# Altium PCB AT89S52单片机入门与提高.PcbDoc (part 1 of 4)
Units mm, origin at the board's own origin, x right, y up, seen from the top; angles counter-clockwise.
Board outline 152.4 x 101.6 mm, 2 copper layers (Top Layer, Bottom Layer); 111 components, 112 nets, 451 pads, 53 vias.
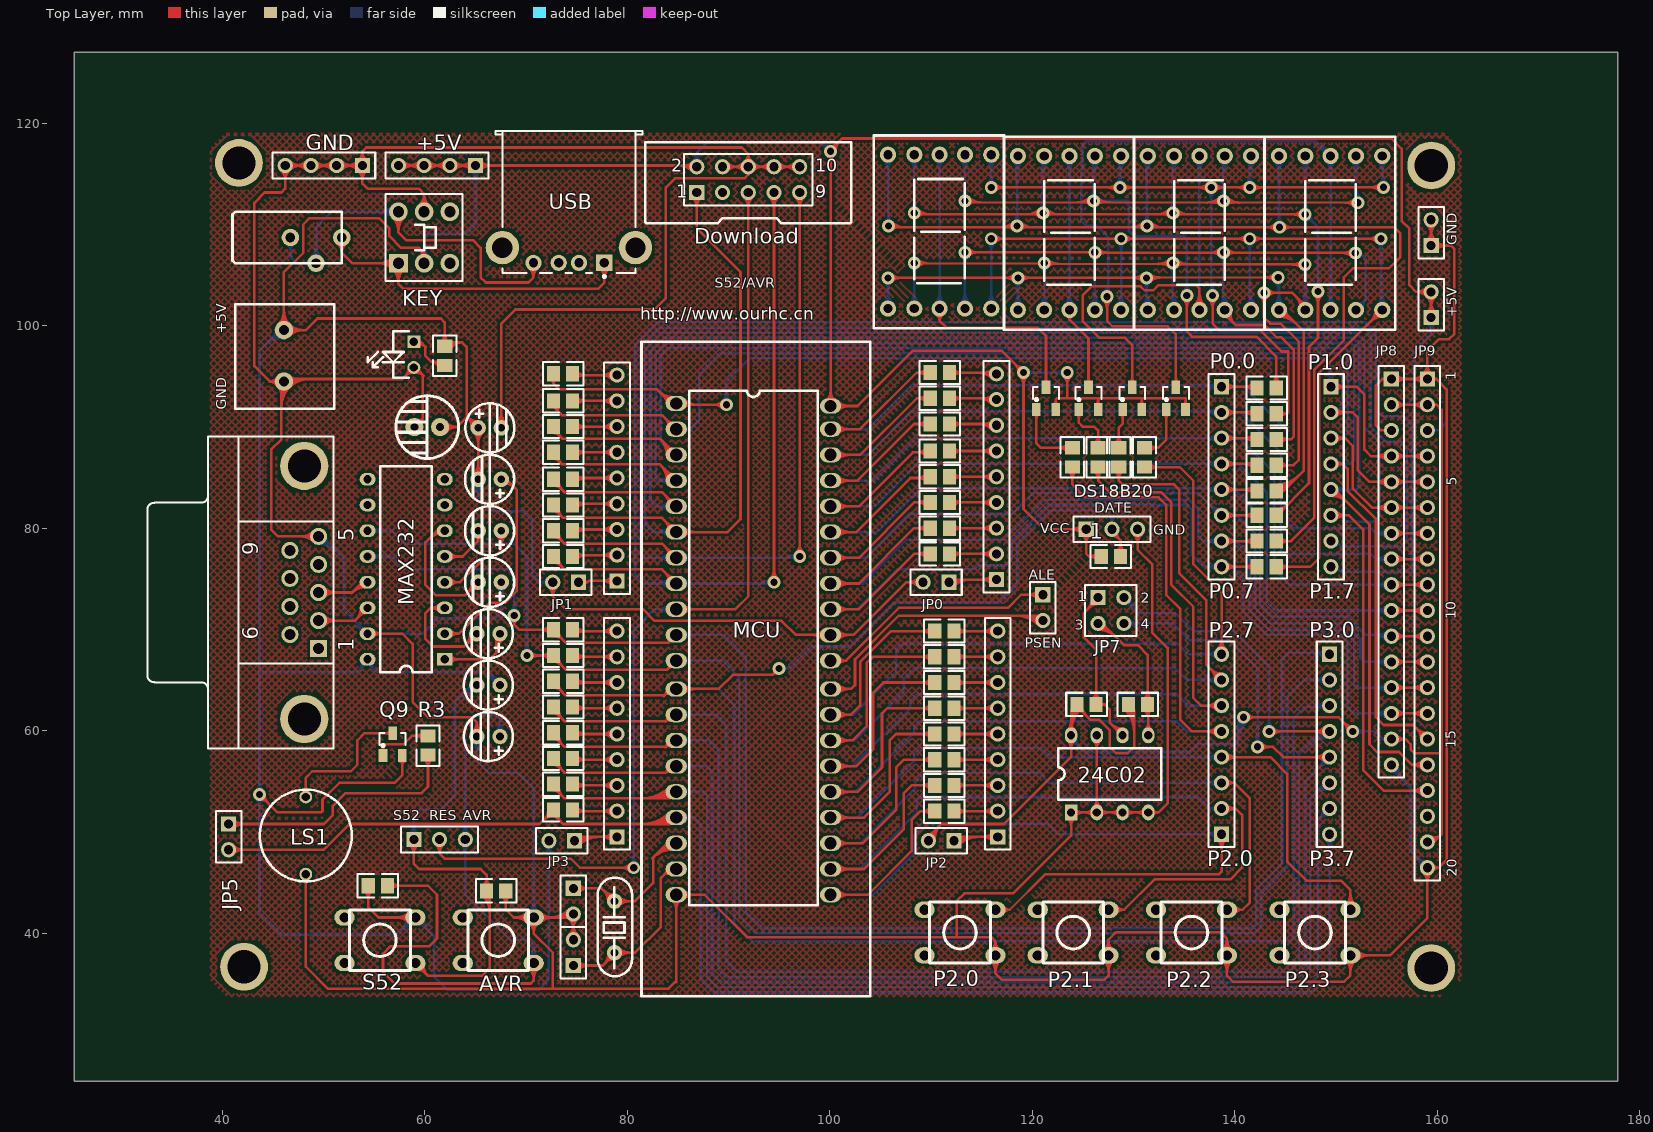
[diagram p0: Top Layer view]
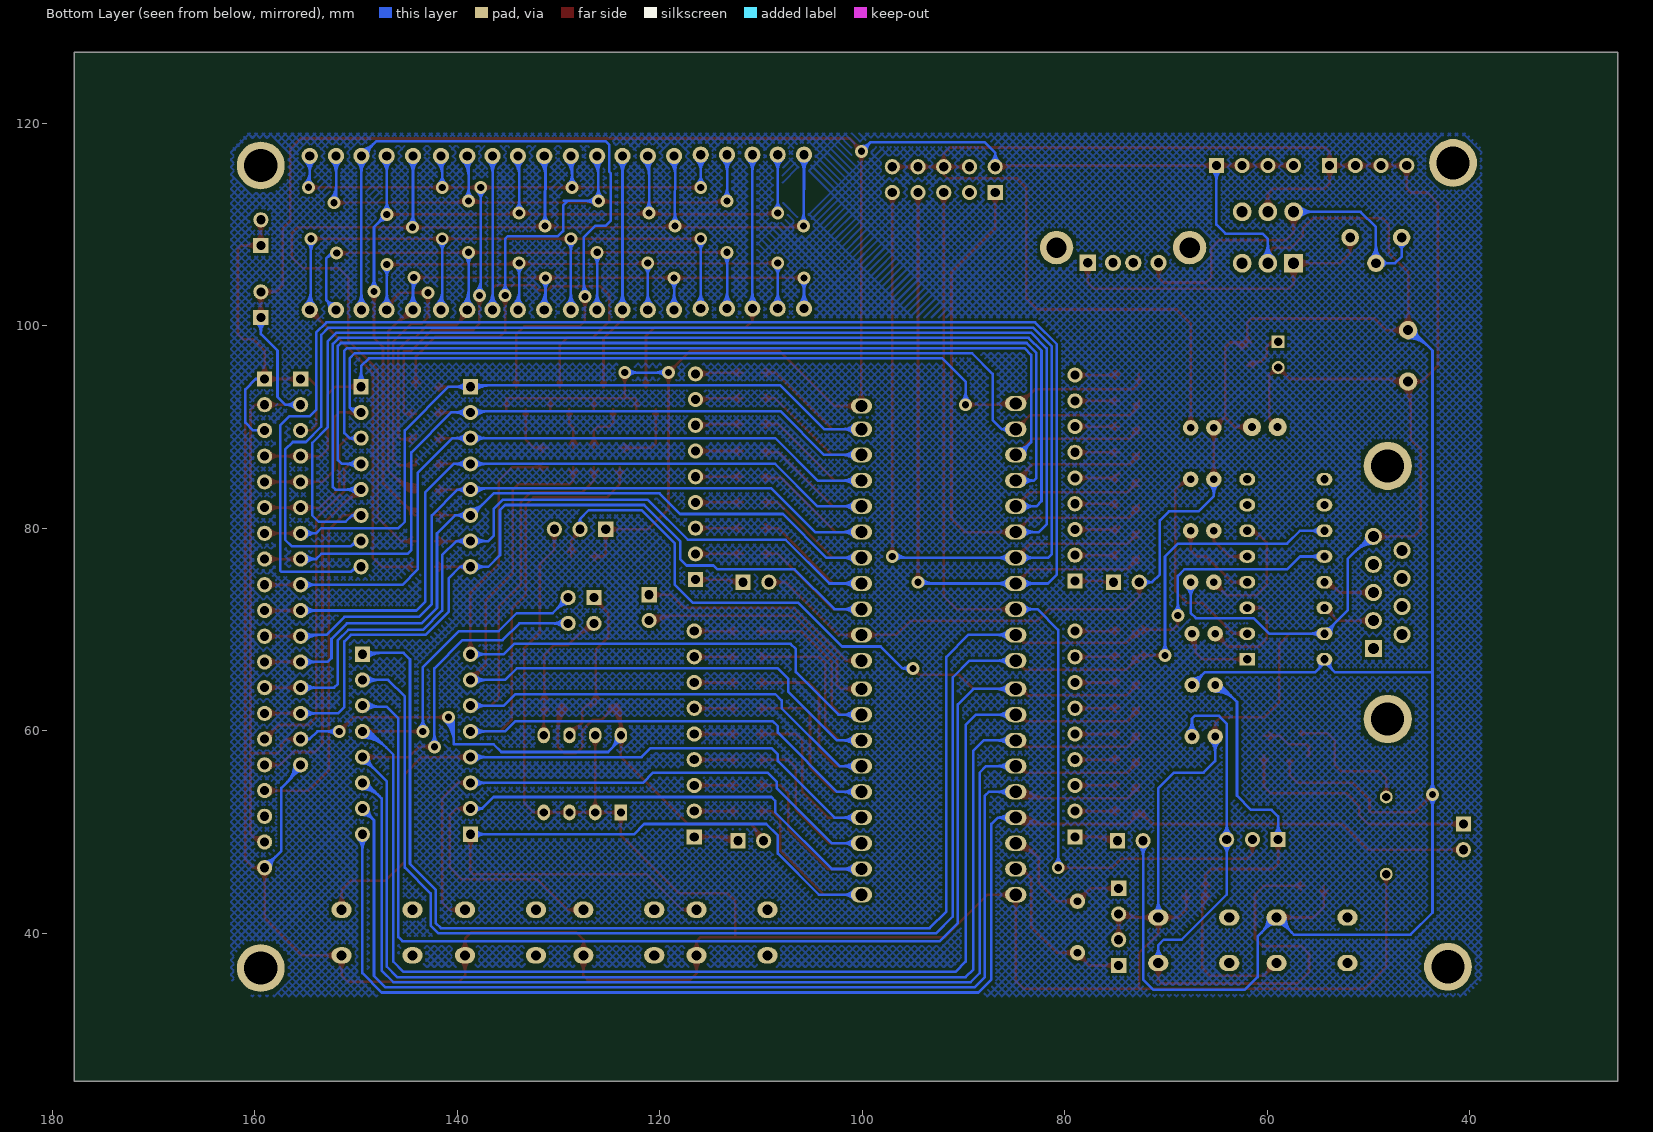
[diagram p1: Bottom Layer view, seen from below]

## Layer stack, top to bottom
Top Layer: signal copper 0.0356
Dielectric: dielectric 0.32, FR-4, Dk 4.8
Bottom Layer: signal copper 0.0356

## Board outline
25.4,25.4 177.8,25.4 177.8,127 25.4,127

## Design rules (kind name [scope] priority, off if disabled: settings)
Clearance [All] p1: gap=0.254
ComponentClearance [All] p1: gap=0.254 collisioncheckmode=3 verticalgap=0.254
PolygonConnect [All] p1: connectstyle=Relief reliefconductorwidth=0.254 reliefentries=4 polygonreliefangle="90 Angle"
RoutingVias [All] p1: holewidth=0.711 width=1.27 viastyle="Through Hole" minholewidth=0.711 minwidth=1.27 maxholewidth=0.711 maxwidth=1.27
SolderMaskExpansion [All] p1: expansion=0.102
TestPointUsage [All] p1: valid=0 allowmultiple=FALSE
Testpoint [All] p1: side=15 testpointundercomponent=TRUE minsize=1.016 maxsize=2.54 preferedsize=1.524 minholesize=0 maxholesize=1.016 preferedholesize=0.813 testpointgrid=0.025 style=1023 order=0-112345678
Width [All] p1: maxlimit=0.254 minlimit=0.254 preferedwidth=0.254
17 further rules are at their usual default settings.

## Classes and differential pairs
component class AT89S52单片机入门与提高: +5V AVR Designator5

## Components (designator, comment, footprint, x,y, rotation, side; value= is the part's Value field where it differs from the comment)
1 "470" R2012-0805 127.762,77.216 r180 top (schematic designator R20)
24C02 "24LC02" DIP8 123.825,51.943 r90 top (schematic designator U2)
+5V "" HDR1X4 65.024,115.824 r180 top
+5V "" JK128 47.244,99.06 r0 top (schematic designator POWER)
+5V "Comment" HDR-2 160.528,104.648 r90 top
ALE "Comment" HDR-2 119.888,69.596 r270 top
AVR "" an-6*6 61.087,44.45 r180 top
C1 "100uF\25v" C-DJ-6 58.928,89.916 r180 top
C2 "10uf" C-DJ-4 65.024,67.056 r180 top
C3 "10uf" C-DJ-4 65.024,61.976 r180 top
C5 "10uf" C-DJ-4 67.691,87.376 r0 top
C6 "10uf" C-DJ-4 65.151,87.376 r180 top
C7 "10uf" C-DJ-4 65.151,82.296 r180 top
C8 "10uf" C-DJ-4 65.151,77.216 r180 top
C9 "10uf" C-DJ-4 65.024,72.136 r180 top
CX1 "30p" HDR1X2 74.676,36.83 r90 top
CX2 "30p" HDR1X2 74.676,44.45 r270 top
D1-0 "LED" R2012-0805 110.871,95.377 r180 top
D1-1 "LED" R2012-0805 73.66,95.25 r180 top
D1-2 "LED" R2012-0805 111.318,52.07 r180 top
D1-3 "LED" R2012-0805 73.66,69.977 r180 top
D2-0 "LED" R2012-0805 110.871,92.837 r180 top
D2-1 "LED" R2012-0805 73.66,92.583 r180 top
D2-2 "LED" R2012-0805 111.318,54.61 r180 top
D2-3 "LED" R2012-0805 73.66,67.437 r180 top
D3-0 "LED" R2012-0805 110.871,90.297 r180 top
D3-1 "LED" R2012-0805 73.66,90.043 r180 top
D3-2 "LED" R2012-0805 111.318,57.15 r180 top
D3-3 "LED" R2012-0805 73.66,64.897 r180 top
D4-0 "LED" R2012-0805 110.871,87.63 r180 top
D4-1 "LED" R2012-0805 73.66,87.503 r180 top
D4-2 "LED" R2012-0805 111.318,59.69 r180 top
D4-3 "LED" R2012-0805 73.66,62.357 r180 top
D5-0 "LED" R2012-0805 110.871,85.09 r180 top
D5-1 "LED" R2012-0805 73.66,84.836 r180 top
D5-2 "LED" R2012-0805 111.318,62.23 r180 top
D5-3 "LED" R2012-0805 73.66,59.817 r180 top
D6-0 "LED" R2012-0805 110.871,82.55 r180 top
D6-1 "LED" R2012-0805 73.66,82.296 r180 top
D6-2 "LED" R2012-0805 111.318,64.77 r180 top
D6-3 "LED" R2012-0805 73.66,57.277 r180 top
D7-0 "LED" R2012-0805 110.871,80.01 r180 top
D7-1 "LED" R2012-0805 73.66,79.756 r180 top
D7-2 "LED" R2012-0805 111.318,67.31 r180 top
D7-3 "LED" R2012-0805 73.66,54.737 r180 top
D8-0 "LED" R2012-0805 110.871,77.47 r180 top
D8-1 "LED" R2012-0805 73.66,77.216 r180 top
D8-2 "LED" R2012-0805 111.318,69.85 r180 top
D8-3 "LED" R2012-0805 73.66,52.197 r180 top
Download "Download" HDR-2x5 91.948,113.284 r0 top
DS1 "LG5011BSR" LED-BSR 110.744,106.807 r0 top
DS2 "LG5011BSR" LED-BSR 123.571,106.68 r0 top
DS3 "LG5011BSR" LED-BSR 136.398,106.68 r0 top
DS4 "LG5011BSR" LED-BSR 149.352,106.68 r0 top
DS18B20 "Comment" HDR-3 131.572,78.74 r0 top
GND "" HDR1X4 53.848,115.824 r180 top
GND "Comment" HDR-2 160.528,111.76 r90 top
J61 "D Connector 9" DSUB1.385-2H9 38.608,73.66 r90 top
JP0 "" HDR1X2 111.76,74.676 r180 top
JP1 "" HDR1X2 75.184,74.676 r180 top
JP2 "" HDR1X2 112.268,49.149 r180 top
JP3 "" HDR1X2 74.803,49.149 r180 top
JP5 "" HDR1X2 40.64,50.8 r270 top (schematic designator JP6)
JP7 "" HDR2X2 126.492,73.152 r270 top
JP8 "Header 16" HDR1X16 155.448,94.742 r270 top
JP9 "" HDR1X20 159.004,94.742 r270 top
KEY "SW-DPST" DPDT-6 59.944,108.712 r90 top
LED1 "LED" LED 58.42,96.393 r90 top
LS1 "" LS1PF 48.26,53.467 r270 top
MAX232 "MAX232" DIP16 61.976,67.056 r180 top (schematic designator U4)
MCU "AT89S52" AT89S52Pid 116.84,65.532 r0 top (schematic designator U1)
P0.0 "" HDR1X8 138.684,93.98 r270 top (schematic designator P0)
P1.0 "" HDR1X8 149.479,93.98 r270 top (schematic designator P1)
P2.0 "key1" an-6*6 106.68,45.212 r180 top
P2.0 "" HDR1X8 138.684,49.784 r90 top (schematic designator P2)
P2.1 "key2" an-6*6 117.856,45.212 r180 top
P2.2 "key3" an-6*6 129.54,45.212 r180 top
P2.3 "key4" an-6*6 141.732,45.212 r180 top
P3.0 "" HDR1X8 149.352,67.564 r270 top (schematic designator P3)
P-R0 "" HDR1X9#1 116.459,95.25 r270 top
P-R1 "" HDR1X9#1 78.994,95.123 r270 top
P-R2 "" HDR1X9#2 116.586,49.53 r90 top
P-R3 "" HDR1X9#1 78.994,69.85 r270 top
Q1 "2N3906" SO-G3 122.301,92.71 r0 top
Q2 "2N3906" SO-G3 126.492,92.71 r0 top
Q3 "2N3906" SO-G3 130.81,92.71 r0 top
Q4 "2N3906" SO-G3 135.128,92.71 r0 top
Q9 "2N3906" SO-G3 57.785,58.547 r0 top
R1 "4.7k" R2012-0805 61.976,97.028 r270 top
R3 "10k" R2012-0805 60.325,58.547 r90 top
R4 "10k" R2012-0805 130.429,62.611 r180 top
R5 "10k" R2012-0805 125.349,62.611 r180 top
R11 "470" R2012-0805 143.129,93.853 r0 top
R12 "470" R2012-0805 143.129,91.313 r0 top
R13 "470" R2012-0805 143.129,88.773 r0 top
R14 "470" R2012-0805 143.129,86.233 r0 top
R15 "470" R2012-0805 143.129,83.693 r0 top
R16 "470" R2012-0805 143.129,81.28 r0 top
R17 "470" R2012-0805 143.129,78.74 r0 top
R18 "470" R2012-0805 143.129,76.2 r0 top
R20 "470" R2012-0805 123.952,86.995 r90 top
R21 "470" R2012-0805 126.492,86.995 r90 top
R22 "470" R2012-0805 128.524,86.995 r90 top
R23 "470" R2012-0805 131.064,86.995 r90 top
R51 "10k" R2012-0805 67.056,44.196 r0 top
Ravr "10k" R2012-0805 55.372,44.704 r180 top
RES "" HDR1X3 58.928,49.276 r0 top
S52 "" an-6*6 49.403,44.45 r180 top
USB "" USB-5V 70.612,108.712 r90 top
Y "Y" 11.0592M 78.74,43.18 r90 top
? "Comment" "prower xiao" 49.276,103.632 r0 top

## Footprints (in the part's own frame and the unit in brackets; to place one, negate y for a bottom-side part, rotate by r counter-clockwise, add the part's x,y. Pads: shape width x height; smd on the part's side, far side on the other; paste and mask are expansions set on the pad)
11.0592M [mil]
  round 60 hole 30: 1(-200,0) 2(0,0)
  silkscreen extent -292,-68 92,65
an-6*6 [mm]
  oval 2x1.6 hole 1: 1(-9.675,7.381) 2(-9.675,2.881) 3(-2.675,2.881) 4(-2.675,7.381)
  silkscreen extent -9.17,2.13 -3.18,8.13
AT89S52Pid [mil]
  oval 82.87x59.24 hole 47.75: 1(-1260.15,1054.96) 2(-1260.15,954.96) 3(-1260.15,854.96) 4(-1260.15,754.96) 5(-1260.15,654.96) 6(-1260.15,554.96) 7(-1260.15,454.96) 8(-1260.15,354.96) 9(-1260.15,254.96) 10(-1260.15,154.96) 11(-1260.15,54.96) 12(-1260,-55) 13(-1260,-155) 14(-1260,-255) 15(-1260,-355) 16(-1260,-455) 17(-1260,-555) 18(-1260,-655) 19(-1260,-755) 20(-1260,-855) 21(-660,-855) 22(-660,-755) 23(-660,-655) 24(-660,-555) 25(-660,-455) 26(-660,-355) 27(-660,-255) 28(-660,-155) 29(-660,-55) 30(-660.15,54.96) 31(-660.15,154.96) 32(-660.15,254.96) 33(-660.15,354.96) 34(-660.15,454.96) 35(-660.15,554.96) 36(-660.15,654.96) 37(-660.15,754.96) 38(-660.15,854.96) 39(-660.15,954.96) 40(-660,1045)
  silkscreen extent -1395,-1250 -505,1295
C-DJ-4 [mil]
  round 60 hole 30: 1(-95,100) 2(-5,100)
  silkscreen extent -145,5 46,195
C-DJ-6 [mm]
  round 1.8 hole 0.8: 1(-2.591,-0.076) 2(-0.051,-0.076)
  silkscreen extent -4.42,-3.18 1.78,3.02
DIP8 [mil]
  rect 62x48 hole 32: 1(-0.15,-0.04)
  oval 62x48 hole 32: 2(-0.15,-100.04) 3(-0.15,-200.04) 4(-0.15,-300.04) 5(299.85,-300.04) 6(299.85,-200.04) 7(299.85,-100.04) 8(299.85,-0.04)
  silkscreen extent 50,-350 250,50
DIP16 [mil]
  rect 62x49.21 hole 32: 1(-0.15,-0.04)
  oval 62x49.21 hole 32: 2(-0.15,-100.04) 3(-0.15,-200.04) 4(-0.15,-300.04) 5(-0.15,-400.04) 6(-0.15,-500.04) 7(-0.15,-600.04) 8(-0.15,-700.04) 9(299.85,-700.04) 10(299.85,-600.04) 11(299.85,-500.04) 12(299.85,-400.04) 13(299.85,-300.04) 14(299.85,-200.04) 15(299.85,-100.04) 16(299.85,-0.04)
  silkscreen extent 50,-750 250,50
DPDT-6 [mm]
  round 1.85 hole 1.1: 0(-2.54,-2.54) 0(2.54,-2.54) 2(-2.54,0) 3(2.54,0) 4(2.54,2.54)
  rect 1.85x1.85 hole 1.1: 1(-2.54,2.54)
  silkscreen extent -4.28,-3.81 4.28,3.81
DSUB1.385-2H9 [mm] "Connector; D Subminiature; 9 Position; Right Angle; Pitch 1.385 mm"
  rect 1.69x1.69 hole 1.09: 1(-5.54,-10.92)
  round 1.69 hole 1.09: 2(-2.77,-10.92) 3(0,-10.92) 4(2.77,-10.92) 5(5.54,-10.92) 6(-4.155,-8.08) 7(-1.385,-8.08) 8(1.385,-8.08) 9(4.155,-8.08)
  round 4.76 hole 3.26: 10(-12.495,-9.5) 11(12.495,-9.5)
  silkscreen extent -15.4,-12.4 15.4,6
HDR1X2 [mm] "Connector; Header; 2 Position"
  rect 1.5x1.5 hole 0.9: 1(0,0)
  round 1.5 hole 0.9: 2(2.54,0)
  silkscreen extent -1.27,-1.27 3.81,1.27
HDR1X3 [mm] "Connector; Header; 3 Position"
  rect 1.5x1.5 hole 0.9: 1(0,0)
  round 1.5 hole 0.9: 2(2.54,0) 3(5.08,0)
  silkscreen extent -1.27,-1.27 6.35,1.27
HDR1X4 [mm] "Connector; Header; 4 Position"
  rect 1.5x1.5 hole 0.9: 1(0,0)
  round 1.5 hole 0.9: 2(2.54,0) 3(5.08,0) 4(7.62,0)
  silkscreen extent -1.27,-1.27 8.89,1.27
HDR1X8 [mm] "Connector; Header; 8 Position"
  rect 1.5x1.5 hole 0.9: 1(0,0)
  round 1.5 hole 0.9: 2(2.54,0) 3(5.08,0) 4(7.62,0) 5(10.16,0) 6(12.7,0) 7(15.24,0) 8(17.78,0)
  silkscreen extent -1.27,-1.27 19.05,1.27
HDR1X9#1 [mm] "Connector; Header; 9 Position"
  round 1.5 hole 0.9: 1(0,0) 2(2.54,0) 3(5.08,0) 4(7.62,0) 5(10.16,0) 6(12.7,0) 7(15.24,0) 8(17.78,0)
  rect 1.5x1.5 hole 0.9: 9(20.32,0)
  silkscreen extent -1.27,-1.27 21.59,1.27
HDR1X9#2 [mm] "Connector; Header; 9 Position"
  rect 1.5x1.5 hole 0.9: 1(0,0)
  round 1.5 hole 0.9: 2(2.54,0) 3(5.08,0) 4(7.62,0) 5(10.16,0) 6(12.7,0) 7(15.24,0) 8(17.78,0) 9(20.32,0)
  silkscreen extent -1.27,-1.27 21.59,1.27
HDR1X16 [mm] "Connector; Header; 16 Position"
  rect 1.5x1.5 hole 0.9: 1(0,0)
  round 1.5 hole 0.9: 2(2.54,0) 3(5.08,0) 4(7.62,0) 5(10.16,0) 6(12.7,0) 7(15.24,0) 8(17.78,0) 9(20.32,0) 10(22.86,0) 11(25.4,0) 12(27.94,0) 13(30.48,0) 14(33.02,0) 15(35.56,0) 16(38.1,0)
  silkscreen extent -1.27,-1.27 39.37,1.27
HDR1X20 [mm] "Connector; Header; 20 Position"
  rect 1.5x1.5 hole 0.9: 1(0,0)
  round 1.5 hole 0.9: 2(2.54,0) 3(5.08,0) 4(7.62,0) 5(10.16,0) 6(12.7,0) 7(15.24,0) 8(17.78,0) 9(20.32,0) 10(22.86,0) 11(25.4,0) 12(27.94,0) 13(30.48,0) 14(33.02,0) 15(35.56,0) 16(38.1,0) 17(40.64,0) 18(43.18,0) 19(45.72,0) 20(48.26,0)
  silkscreen extent -1.27,-1.27 49.53,1.27
HDR2X2 [mm] "Connector; Header; 2x2 Position"
  rect 1.5x1.5 hole 0.9: 1(0,0)
  round 1.5 hole 0.9: 2(0,2.54) 3(2.54,0) 4(2.54,2.54)
  silkscreen extent -1.27,-1.27 3.81,3.81
HDR-2 [mm]
  rect 1.5x1.5 hole 0.9: 1(-3.84,1.148)
  round 1.5 hole 0.9: 2(-1.3,1.148)
  silkscreen extent -5.11,-0.12 -0.03,2.42
HDR-2x5 [mm]
  rect 1.5x1.5 hole 0.9: 1(-5.08,-0.127)
  round 1.5 hole 0.9: 2(-5.08,2.413) 3(-2.54,-0.127) 4(-2.54,2.413) 5(0,-0.127) 6(0,2.413) 7(2.54,-0.127) 8(2.54,2.413) 9(5.08,-0.127) 10(5.08,2.413)
  silkscreen extent -10.16,-3.17 10.16,4.83
HDR-3 [mm]
  rect 1.5x1.5 hole 0.9: 1(-6.253,1.165)
  round 1.5 hole 0.9: 2(-3.713,1.165) 3(-1.173,1.165)
  silkscreen extent -7.52,-0.11 0.1,2.43
JK128 [mil]
  round 71.81 hole 39.37: 1(-45,20) 2(-45,-180)
  silkscreen extent -235,-285 150,120
LED [mil]
  rect 50x50 hole 32: 1(80,-20)
  round 50 hole 32: 2(-20,-20)
  silkscreen extent -60,0 120,160
LED-BSR [mm]
  round 1.6 hole 0.9: 1(-5,-5.119) 2(-2.4,-5.119) 3(0.1,-5.119) 4(2.6,-5.119) 5(5.2,-5.119) 6(5.2,10.081) 7(2.6,10.081) 8(0.1,10.081) 9(-2.4,10.081) 10(-5,10.081)
  silkscreen extent -6.4,-7.07 6.5,11.98
LS1PF [mil] "LS1"
  round 50 hole 32: 1(0,0) 2(300,0)
  silkscreen extent -28,-178 328,178
"prower xiao" [mm]
  round 1.724 hole 0.962: 1(2.54,5.08) 2(0,2.54) 3(-2.54,5.08)
  silkscreen extent -8.25,2.54 2.54,7.62
R2012-0805 [mm] "Thermistor; 2 Leads"
  rect 1.3x1.5 smd: 1(-0.95,0) 2(0.95,0)
  silkscreen extent -2,-1.15 2,1.15
SO-G3 [mm] "SOT-23; 3 Leads; Body 3.0 x 2.6 mm, inc. leads (LxW max)"
  rect 0.85x1.3 smd: 1(-1.9,-0.983) 2(0,-0.983) 3(-0.95,1.217)
  silkscreen extent -2.23,-0.12 0.32,1.22
USB-5V [mm]
  rect 1.6x1.6 hole 0.92: 1(-2.503,-7.123)
  round 1.6 hole 0.92: 2(-2.503,-4.624) 3(-2.503,-2.624) 4(-2.503,-0.124)
  round 3.3 hole 2: 5(-1.002,2.947) 6(-1.002,-10.193)
  silkscreen extent -3.98,-10.87 10.5,3.63

## Part data
1 R1 R3 R4 R5 R11 R12 R13 R14 R15 R16 R17 R18 R20 R21 R22 R23 R51 Ravr: library part RES2
+5V GND USB: library part "Header 4", "Header, 4-Pin"
+5V JP0 JP1 JP2 JP3 JP5: library part "Header 2", "Header, 2-Pin"
AVR S52: library part SW-PB, "Switch"
C1 C2 C3 C5 C6 C7 C8 C9: library part "CAPACITOR POL", "Capacitor"
CX1 CX2: library part CAP, "Capacitor"
Download: library part "Header 5X2", "Header, 5-Pin, Dual row"
DS1 DS2 DS3 DS4: library part "Dpy Blue-CA", "14.2 mm General Purpose Blue 7-Segment Display: CA, RH DP, Gray Surface"
J61: "Receptacle Assembly, 9 Position, Right Angle"
JP7: library part "Header 2X2", "Header, 2-Pin, Dual row"
JP8: "Header, 16-Pin"
JP9: library part "Header 20", "Header, 20-Pin"
KEY: "Double-Pole, Single-Throw Switch"
LS1: library part Speaker, "Loudspeaker"
MCU: library part 8051
P0.0 P1.0 P2.0 P3.0: library part MHDR1X8, "Header, 8-Pin"
P2.0 P2.1 P2.2 P2.3: library part key
P-R0 P-R1 P-R2 P-R3: library part MHDR1X9, "Header, 9-Pin"
Q1 Q2 Q3 Q4 Q9: "PNP General Purpose Amplifier"
RES: library part "Header 3", "Header, 3-Pin"
Y: library part CRYSTAL, "Crystal"

## Free pads (board coordinates)
  round 4.72 hole 3.267: ""(41.656,116.078) ""(42.164,36.703) ""(159.385,36.576) ""(159.385,115.824)

## Via types
v1: diameter 1.27, hole 0.711, Top Layer to Bottom Layer, 53 vias

## Nets (pads, with @x,y where several pads share a name; then routed paths per layer and width w, separated by ;. In a path a pad name is that pad's centre, name@x,y a point inside that pad or via, vN(x,y) a via of type N, cw(c..) or ccw(c..) an arc to the next point about the centre after c; other vN are vias at no path point)
A: DS1.7 DS2.7 DS3.7 DS4.7 R11.2 | length 140.1
  Top Layer w0.254: v1(113.344,112.328) 113.471,112.201 v1(152.146,112.141) ; v1@113.524,112.507 ccw(c114.265,113.246) 114.263,112.2 ; v1@113.703,111.968 cw(c114.263,111.406) 114.264,112.2 ; v1@113.704,112.687 ccw(c114.879,113.858) 114.876,112.199 ; 124.464,112.184 ccw(c124.466,113.911) v1@125.685,112.688 ; 125.077,112.183 ccw(c125.079,113.296) v1@125.865,112.508 ; 125.171,112.183 cw(c125.17,111.457) v1@125.684,111.969 ; v1@126.224,112.507 ccw(c127.012,113.293) 127.011,112.18 ; v1@126.403,111.968 cw(c126.915,111.454) 126.916,112.18 ; v1@126.404,112.687 ccw(c127.627,113.906) 127.624,112.179 ; v1@134.896,102.638 cw(c134.029,101.771) 135.255,101.771 cw(c136.481,101.771) v1@135.614,102.638 ; v1(135.255,102.997) 135.255,99.441 135.763,98.933 142.113,98.933 144.079,96.967 R11.2@144.079,93.853 ; 137.243,112.164 ccw(c137.245,113.959) v1@138.512,112.688 ; 137.856,112.163 ccw(c137.858,113.345) v1@138.692,112.508 ; 138.046,112.163 cw(c138.045,111.505) v1@138.511,111.969 ; v1@139.051,112.507 ccw(c139.888,113.341) 139.886,112.16 ; v1@139.23,111.968 cw(c139.694,111.502) 139.695,112.16 ; v1@139.231,112.687 ccw(c140.502,113.954) 140.499,112.159 ; R11.2@143.709,94.323 ccw(c142.816,95.216) 144.079,95.216 ccw(c145.342,95.216) R11.2@144.449,94.323 ; v1@151.786,111.782 ccw(c150.918,110.916) 150.92,112.143 ccw(c150.921,113.369) v1@151.787,112.501
  Bottom Layer w0.254: DS1.7@112.868,116.412 cw(c111.719,115.263) 113.344,115.263 cw(c114.969,115.263) DS1.7@113.82,116.412 ; v1@112.985,112.687 ccw(c112.118,113.554) 113.344,113.554 ccw(c114.57,113.554) v1@113.703,112.687 ; DS1.7@113.048,116.591 cw(c112.332,115.876) 113.344,115.876 cw(c114.356,115.876) DS1.7@113.64,116.591 ; v1(113.344,112.328) DS1.7@113.344,116.888 ; v1@125.685,112.687 ccw(c124.818,113.554) 126.044,113.554 ccw(c127.27,113.554) 126.403,112.687 ccw(c127.27,113.554) 127.27,112.328 ccw(c127.27,111.102) v1@126.403,111.969 ; DS2.7@125.695,116.285 cw(c124.853,115.442) 126.044,115.442 cw(c127.489,115.442) DS2.7@126.467,116.464 ; 126.044,114.829 cw(c128.102,114.829) DS2.7@126.647,116.285 ; DS2.7@126.044,116.888 v1(126.044,112.328) 129.48,112.328 ; 129.099,112.328 129.54,111.887 129.54,109.347 130.048,108.839 135.001,108.839 135.255,108.585 v1(135.255,102.997) ; v1@134.896,103.356 ccw(c134.029,104.223) 135.255,104.223 ccw(c136.481,104.223) v1@135.614,103.356 ; v1@138.512,112.687 ccw(c137.645,113.554) 138.871,113.554 ccw(c140.097,113.554) v1@139.23,112.687 ; DS3.7@138.522,116.285 cw(c137.68,115.442) 138.871,115.442 cw(c140.316,115.442) DS3.7@139.294,116.464 ; v1(138.871,112.328) DS3.7@138.871,116.888 ; 138.871,114.829 cw(c140.929,114.829) DS3.7@139.474,116.285 ; DS4.7@151.476,116.285 cw(c150.327,115.136) 151.952,115.136 cw(c153.577,115.136) DS4.7@152.428,116.285 ; DS4.7@151.656,116.464 cw(c150.94,115.749) 151.952,115.749 cw(c152.964,115.749) DS4.7@152.248,116.464 ; v1@151.787,112.5 ccw(c151.388,112.899) 151.952,112.899 ; 151.952,113.223 ccw(c153.228,113.223) v1@152.326,112.321 ; 151.952,113.836 ccw(c153.841,113.836) v1@152.505,112.5 ; DS4.7@151.952,116.761 151.952,112.335 v1(152.146,112.141)
ALE: ALE.1 MCU.30 | length 29.1
  Top Layer w0.254: MCU.30@100.072,66.928 101.599,66.928 ; MCU.30@100.878,66.561 cw(c101.599,66.038) 101.599,66.928 ; MCU.30@100.878,67.295 ccw(c101.599,67.818) 101.599,66.928 ; ALE.1@120.595,72.995 ccw(c119.532,71.932) 119.532,73.436 ccw(c119.532,74.94) ALE.1@120.595,73.877 ; ALE.1@120.775,73.175 ccw(c120.145,72.545) 120.145,73.436 ccw(c120.145,74.327) ALE.1@120.775,73.697 ; ALE.1@121.036,73.436 118.902,73.436 117.602,72.136 106.807,72.136 101.599,66.928
B: DS1.6 DS2.6 DS3.6 DS4.6 R12.2 | length 129.3
  Top Layer w0.254: v1(115.944,113.658) 155.06,113.658 v1(154.686,113.665) ; v1@116.303,113.299 cw(c117.17,112.432) 117.17,113.658 cw(c117.17,114.884) v1@116.303,114.017 ; v1@128.285,113.299 ccw(c127.418,112.432) 127.418,113.658 ccw(c127.418,114.884) v1@128.285,114.017 ; v1@129.003,113.299 cw(c129.87,112.432) 129.87,113.658 cw(c129.87,114.884) v1@129.003,114.017 ; v1@137.309,113.299 ccw(c136.442,112.432) 136.442,113.658 ccw(c136.442,114.884) v1@137.309,114.017 ; v1@137.436,102.638 cw(c136.569,101.771) 137.795,101.771 cw(c139.021,101.771) v1@138.154,102.638 ; v1(137.795,102.997) 137.795,100.203 138.43,99.568 142.494,99.568 144.609,97.453 145.288,97.453 145.288,91.44 145.161,91.313 ; v1@138.027,113.299 cw(c138.894,112.432) 138.894,113.658 cw(c138.894,114.884) v1@138.027,114.017 ; v1@141.112,113.299 ccw(c140.245,112.432) 140.245,113.658 ccw(c140.245,114.884) v1@141.112,114.017 ; v1@141.83,113.299 cw(c142.697,112.432) 142.697,113.658 cw(c142.697,114.884) v1@141.83,114.017 ; R12.2@144.079,91.313 145.161,91.313 ; R12.2@144.489,90.988 cw(c145.161,90.455) 145.161,91.313 ; R12.2@144.489,91.638 ccw(c145.161,92.171) 145.161,91.313 ; 153.443,113.658 ccw(c153.443,114.908) v1@154.327,114.024 ; 153.477,113.658 cw(c153.477,112.456) v1@154.327,113.306
  Bottom Layer w0.254: DS1.6@115.468,116.412 cw(c114.319,115.263) 115.944,115.263 cw(c117.569,115.263) DS1.6@116.42,116.412 ; v1@115.585,114.017 ccw(c114.718,114.884) 115.944,114.884 ccw(c117.17,114.884) v1@116.303,114.017 ; DS1.6@115.648,116.591 cw(c114.932,115.876) 115.944,115.876 cw(c116.956,115.876) DS1.6@116.24,116.591 ; v1(115.944,113.658) DS1.6@115.944,116.888 ; v1@128.285,114.017 ccw(c127.418,114.884) 128.644,114.884 ccw(c129.87,114.884) v1@129.003,114.017 ; DS2.6@128.295,116.285 cw(c127.453,115.442) 128.644,115.442 cw(c130.089,115.442) DS2.6@129.067,116.464 ; v1(128.644,113.658) DS2.6@128.644,116.761 ; 128.644,114.829 cw(c130.702,114.829) DS2.6@129.247,116.285 ; v1@137.309,113.299 cw(c136.442,112.432) 137.668,112.432 cw(c138.894,112.432) v1@138.027,113.299 ; v1@137.436,103.356 ccw(c136.875,103.917) 137.668,103.917 ccw(c138.715,103.917) v1@137.975,103.177 ; 137.668,104.53 ccw(c139.328,104.53) v1@138.154,103.356 ; v1(137.668,113.658) 137.668,103.124 v1(137.795,102.997) ; v1@141.112,114.017 ccw(c140.245,114.884) 141.471,114.884 ccw(c142.697,114.884) v1@141.83,114.017 ; DS3.6@141.122,116.285 cw(c140.28,115.442) 141.471,115.442 cw(c142.916,115.442) DS3.6@141.894,116.464 ; v1(141.471,113.658) DS3.6@141.471,116.761 ; 141.471,114.829 cw(c143.529,114.829) DS3.6@142.074,116.285 ; DS4.6@154.076,116.285 cw(c152.927,115.136) 154.552,115.136 cw(c156.177,115.136) DS4.6@155.028,116.285 ; DS4.6@154.256,116.464 cw(c153.54,115.749) 154.552,115.749 cw(c155.564,115.749) DS4.6@154.848,116.464 ; v1@154.327,114.024 ccw(c153.783,114.568) 154.552,114.568 ; 154.552,114.602 ccw(c155.623,114.602) v1@154.866,113.845 ; 154.552,115.215 ccw(c156.236,115.215) v1@155.045,114.024 ; DS4.6@154.552,116.761 154.552,113.799 v1(154.686,113.665)
C: DS1.4 DS2.4 DS3.4 DS4.4 R13.2 | length 120
  Top Layer w0.254: v1(113.344,107.248) 126.171,107.228 138.871,107.208 v1(151.892,107.188) ; v1@113.703,106.888 cw(c114.569,106.02) 114.57,107.246 cw(c114.572,108.473) v1@113.704,107.607 ; v1@126.351,107.427 ccw(c126.833,107.908) 126.832,107.227 ; v1@126.53,106.888 cw(c127.347,106.068) 127.349,107.226 ; v1@126.531,107.607 ccw(c127.448,108.521) 127.446,107.226 ; 137.549,107.21 ccw(c137.551,108.572) v1@138.512,107.608 ; 137.74,107.21 cw(c137.739,106.119) v1@138.511,106.889 ; 138.162,107.209 ccw(c138.163,107.958) v1@138.692,107.428 ; DS3.4@138.998,100.888 cw(c138.998,100.232) 139.461,100.696 ; DS3.4@138.998,101.561 138.998,101.159 140.081,100.076 142.919,100.076 144.134,98.861 144.598,98.861 145.796,97.663 145.796,89.027 145.542,88.773 R13.2@144.079,88.773 R13.2@144.079,89.22 ; v1@139.051,107.427 ccw(c139.581,107.956) 139.58,107.207 ; v1@139.23,106.888 cw(c140,106.116) 140.001,107.207 ; v1@139.231,107.607 ccw(c140.195,108.568) 140.193,107.206 ; DS3.4@139.394,101.424 ccw(c140.182,101.153) 139.593,100.564 ; DS3.4@139.634,101.342 ccw(c140.609,101.006) 139.88,100.277 ; R13.2@144.449,88.403 cw(c145.342,87.51) 145.342,88.773 cw(c145.342,90.036) R13.2@144.449,89.143 ; v1@151.532,106.829 ccw(c150.664,105.963) 150.666,107.19 ccw(c150.667,108.416) v1@151.533,107.548
  Bottom Layer w0.254: DS1.4@112.868,102.163 ccw(c111.719,103.312) 113.344,103.312 ccw(c114.969,103.312) DS1.4@113.82,102.163 ; v1@112.985,106.889 cw(c112.118,106.022) 113.344,106.022 cw(c114.57,106.022) v1@113.703,106.889 ; DS1.4@113.048,101.984 ccw(c112.332,102.699) 113.344,102.699 ccw(c114.356,102.699) DS1.4@113.64,101.984 ; DS1.4@113.344,101.688 v1(113.344,107.248) ; DS2.4@125.695,102.036 ccw(c124.546,103.185) 126.171,103.185 ccw(c127.796,103.185) DS2.4@126.647,102.036 ; v1@125.812,106.889 cw(c124.945,106.022) 126.171,106.022 cw(c127.397,106.022) v1@126.53,106.889 ; DS2.4@125.875,101.857 ccw(c125.159,102.572) 126.171,102.572 ccw(c127.183,102.572) DS2.4@126.467,101.857 ; DS2.4@126.171,101.688 v1(126.171,107.248) ; v1@138.512,106.889 cw(c137.645,106.022) 138.871,106.022 cw(c140.097,106.022) v1@139.23,106.889 ; DS3.4@138.522,102.036 ccw(c137.68,102.879) 138.871,102.879 ccw(c140.316,102.879) DS3.4@139.294,101.857 ; DS3.4@138.871,101.688 v1(138.871,107.248) ; 138.871,103.492 ccw(c140.929,103.492) DS3.4@139.474,102.036 ; DS4.4@151.952,101.561 152.908,102.517 ; v1@151.967,106.945 cw(c152.232,106.091) 152.864,106.724 ; DS4.4@152.01,101.976 ccw(c152.098,102.605) 152.547,102.156 ccw(c152.997,101.706) DS4.4@152.367,101.618 ; DS4.4@152.045,102.227 ccw(c152.186,103.239) 152.908,102.517 ; 152.567,107.021 ccw(c152.091,106.546) v1(151.892,107.188) 152.4,107.188 152.908,106.68 152.908,102.517 ; DS4.4@152.619,101.653 cw(c153.63,101.794) 152.908,102.517
D: DS1.2 DS2.2 DS3.2 DS4.2 R14.2 | length 127.6
  Top Layer w0.254: v1(108.344,106.185) 121.171,106.138 v1(146.939,106.045) ; v1@108.702,105.824 cw(c109.566,104.954) 109.57,106.181 cw(c109.575,107.407) v1@108.705,106.543 ; v1@121.351,106.364 ccw(c121.899,106.908) 121.896,106.136 ; v1@121.529,105.824 cw(c122.281,105.067) 122.285,106.134 ; v1@121.532,106.543 ccw(c122.515,107.519) 122.51,106.134 ; 132.421,106.098 ccw(c132.426,107.64) v1@133.513,106.546 ; 132.868,106.096 cw(c132.865,105.186) v1@133.51,105.827 ; 133.034,106.095 ccw(c133.037,107.025) v1@133.692,106.365 ; v1@134.051,106.364 ccw(c134.711,107.019) 134.707,106.089 ; v1@134.229,105.824 cw(c134.87,105.179) 134.874,106.089 ; v1@134.232,106.543 ccw(c135.326,107.63) 135.321,106.087 ; v1@142.516,102.892 cw(c141.649,102.025) 142.875,102.025 cw(c144.101,102.025) 143.234,102.892 cw(c144.101,102.025) 144.101,103.251 cw(c144.101,104.477) v1@143.234,103.61 ; R14.2@144.079,86.807 R14.2@144.079,86.233 145.796,86.233 146.304,86.741 146.304,98.425 144.526,100.203 143.51,100.203 142.875,100.838 v1(142.875,103.251) 145.669,103.251 146.952,101.968 DS4.2@146.952,101.561 ; R14.2@144.449,85.863 cw(c145.342,84.97) 145.342,86.233 cw(c145.342,87.496) R14.2@144.449,86.603 ; 145.949,102.971 cw(c144.538,101.561) DS4.2@146.533,101.561 ; 146.382,102.538 cw(c145.405,101.561) DS4.2@146.787,101.561 ; 146.499,102.421 ccw(c146.952,102.875) DS4.2@146.952,102.234 ; v1@146.578,105.687 ccw(c145.708,104.823) 145.713,106.049 ccw(c145.717,107.276) v1@146.581,106.406
  Bottom Layer w0.254: DS1.2@107.868,102.163 ccw(c106.719,103.312) 108.344,103.312 ccw(c109.969,103.312) DS1.2@108.82,102.163 ; v1@107.985,105.826 cw(c107.118,104.959) 108.344,104.959 cw(c109.57,104.959) v1@108.703,105.826 ; DS1.2@108.048,101.984 ccw(c107.332,102.699) 108.344,102.699 ccw(c109.356,102.699) DS1.2@108.64,101.984 ; DS1.2@108.344,101.688 v1(108.344,106.185) ; DS2.2@120.695,102.036 ccw(c119.546,103.185) 121.171,103.185 ccw(c122.796,103.185) DS2.2@121.647,102.036 ; v1@120.812,105.826 cw(c119.945,104.959) 121.171,104.959 cw(c122.397,104.959) v1@121.53,105.826 ; DS2.2@120.875,101.857 ccw(c120.159,102.572) 121.171,102.572 ccw(c122.183,102.572) DS2.2@121.467,101.857 ; DS2.2@121.171,101.688 v1(121.171,106.185) ; v1@133.512,105.826 cw(c132.645,104.959) 133.871,104.959 cw(c135.097,104.959) v1@134.23,105.826 ; DS3.2@133.522,102.036 ccw(c132.68,102.879) 133.871,102.879 ccw(c135.316,102.879) DS3.2@134.294,101.857 ; DS3.2@133.871,101.688 v1(133.871,106.185) ; 133.871,103.492 ccw(c135.929,103.492) DS3.2@134.474,102.036 ; DS4.2@146.476,102.036 ccw(c145.359,103.154) 146.939,103.154 ; v1@146.58,105.686 cw(c145.713,104.819) 146.939,104.819 cw(c148.165,104.819) v1@147.298,105.686 ; DS4.2@146.656,101.857 ccw(c145.972,102.541) 146.939,102.541 ; 146.939,102.604 ccw(c147.995,102.604) DS4.2@147.248,101.857 ; 146.939,103.217 ccw(c148.608,103.217) DS4.2@147.428,102.036 ; v1(146.939,106.045) 146.939,101.574 DS4.2@146.952,101.561
DP: DS1.5 DS2.5 DS3.5 DS4.5 R18.2 | length 137.1
  Top Layer w0.254: v1(115.944,108.592) 128.771,108.59 141.471,108.587 v1(154.432,108.585) ; v1@116.303,108.233 cw(c117.17,107.365) 117.17,108.592 cw(c117.171,109.818) v1@116.303,108.951 ; v1@129.13,108.233 cw(c129.992,107.371) 129.992,108.589 ; v1@129.13,108.951 ccw(c130.003,109.824) 130.003,108.589 ; 140.233,108.588 ccw(c140.234,109.83) v1@141.112,108.951 ; 140.256,108.588 cw(c140.256,107.377) v1@141.112,108.233 ; v1@141.83,108.233 cw(c142.686,107.377) 142.686,108.587 ; v1@141.83,108.951 ccw(c142.709,109.829) 142.709,108.587 ; R18.2@144.079,76.2 147.447,76.2 148.336,77.089 148.336,95.377 153.035,100.076 153.067,100.076 DS4.5@154.552,101.561 ; R18.2@144.449,75.83 cw(c145.342,74.937) 145.342,76.2 cw(c145.342,77.463) R18.2@144.449,76.57 ; DS4.5@153.879,101.561 cw(c152.254,101.561) 153.403,100.412 cw(c154.552,99.263) DS4.5@154.552,100.888 ; v1@154.073,108.226 ccw(c153.205,107.359) 153.206,108.585 ccw(c153.206,109.812) v1@154.073,108.944 ; DS4.5@154.133,101.561 cw(c153.121,101.561) 153.837,100.845 cw(c154.552,100.13) DS4.5@154.552,101.142
  Bottom Layer w0.254: DS1.5@115.468,102.163 ccw(c114.319,103.312) 115.944,103.312 ccw(c117.569,103.312) DS1.5@116.42,102.163 ; v1@115.585,108.233 cw(c114.718,107.366) 115.944,107.366 cw(c117.17,107.366) v1@116.303,108.233 ; DS1.5@115.648,101.984 ccw(c114.932,102.699) 115.944,102.699 ccw(c116.956,102.699) DS1.5@116.24,101.984 ; DS1.5@115.944,101.688 v1(115.944,108.592) ; DS2.5@128.295,102.036 ccw(c127.146,103.185) 128.771,103.185 ccw(c130.396,103.185) DS2.5@129.247,102.036 ; v1@128.412,108.233 cw(c127.545,107.366) 128.771,107.366 cw(c129.997,107.366) v1@129.13,108.233 ; DS2.5@128.475,101.857 ccw(c127.759,102.572) 128.771,102.572 ccw(c129.783,102.572) DS2.5@129.067,101.857 ; DS2.5@128.771,101.688 v1(128.771,108.592) ; v1@141.112,108.233 cw(c140.245,107.366) 141.471,107.366 cw(c142.697,107.366) v1@141.83,108.233 ; DS3.5@141.122,102.036 ccw(c140.28,102.879) 141.471,102.879 ccw(c142.916,102.879) DS3.5@141.894,101.857 ; DS3.5@141.471,101.688 v1(141.471,108.592) ; 141.471,103.492 ccw(c143.529,103.492) DS3.5@142.074,102.036 ; v1@154.073,108.226 cw(c153.206,107.359) 154.432,107.359 cw(c155.658,107.359) v1@154.791,108.226 ; DS4.5@154.076,102.036 ccw(c153.217,102.896) 154.432,102.896 ; 154.432,102.862 ccw(c155.853,102.862) DS4.5@154.848,101.857 ; 154.432,103.475 ccw(c156.466,103.475) DS4.5@155.028,102.036 ; v1(154.432,108.585) 154.432,101.681 DS4.5@154.552,101.561
E: DS1.1 DS2.1 DS3.1 DS4.1 R15.2 | length 121.9
  Top Layer w0.254: v1(105.744,104.728) 118.571,104.744 131.271,104.759 v1(144.272,104.775) ; v1@106.103,105.088 ccw(c106.969,105.956) 106.97,104.73 ccw(c106.972,103.503) v1@106.104,104.369 ; 117.307,104.742 cw(c117.308,103.462) v1@118.212,104.368 ; 117.382,104.742 ccw(c117.381,105.915) v1@118.211,105.087 ; 117.92,104.743 cw(c117.921,104.076) v1@118.392,104.548 ; v1@118.751,104.549 cw(c119.223,104.078) 119.222,104.744 ; v1@118.93,105.088 ccw(c119.758,105.918) 119.76,104.745 ; v1@118.931,104.369 cw(c119.837,103.465) 119.835,104.745 ; 129.969,104.758 cw(c129.971,103.425) v1@130.912,104.368 ; 130.12,104.758 ccw(c130.118,105.878) v1@130.911,105.087 ; 130.583,104.758 cw(c130.583,104.039) v1@131.092,104.548 ; v1@131.451,104.549 cw(c131.96,104.04) 131.959,104.76 ; v1@131.63,105.088 ccw(c132.421,105.881) 132.422,104.761 ; v1@131.631,104.369 cw(c132.574,103.428) 132.573,104.761 ; v1@143.912,105.134 cw(c143.044,106) 143.046,104.774 cw(c143.047,103.547) v1@143.913,104.415 ; R15.2@144.079,83.554 ccw(c144.079,84.911) 145.038,83.951 ; R15.2@144.079,83.693 144.78,83.693 ; R15.2@144.079,83.808 ccw(c144.079,85.778) 145.472,84.385 ; R15.2@144.079,84.062 ccw(c144.079,86.645) 145.906,84.819 ; R15.2@144.079,84.316 ccw(c144.079,87.512) 146.339,85.252 ; DS4.1@144.352,100.888 cw(c144.352,98.441) 146.082,100.171 ; DS4.1@144.352,101.142 cw(c144.352,99.308) 145.648,100.605 ; DS4.1@144.352,101.396 cw(c144.352,100.175) 145.215,101.038 ; R15.2@144.58,83.544 cw(c144.78,83.485) 144.78,83.693 ; R15.2@144.58,83.842 ccw(c144.78,83.901) 144.78,83.693 ; DS4.1@144.987,101.561 144.987,101.266 146.812,99.441 146.812,85.725 144.78,83.693 ; DS4.1@145.025,101.561 ccw(c145.828,101.561) 145.26,100.993
  Bottom Layer w0.254: DS1.1@105.268,102.163 ccw(c104.119,103.312) 105.744,103.312 ccw(c107.369,103.312) DS1.1@106.22,102.163 ; v1@105.385,104.369 cw(c104.518,103.502) 105.744,103.502 cw(c106.97,103.502) v1@106.103,104.369 ; DS1.1@105.448,101.984 ccw(c104.732,102.699) 105.744,102.699 ccw(c106.756,102.699) DS1.1@106.04,101.984 ; DS1.1@105.744,101.688 v1(105.744,104.728) ; DS2.1@118.095,102.036 ccw(c116.946,103.185) 118.571,103.185 ccw(c120.196,103.185) DS2.1@119.047,102.036 ; v1@118.212,104.369 cw(c117.345,103.502) 118.571,103.502 cw(c119.797,103.502) v1@118.93,104.369 ; DS2.1@118.275,101.857 ccw(c117.559,102.572) 118.571,102.572 ccw(c119.583,102.572) DS2.1@118.867,101.857 ; DS2.1@118.571,101.688 v1(118.571,104.728) ; v1@130.912,104.369 cw(c130.045,103.502) 131.271,103.502 cw(c132.497,103.502) v1@131.63,104.369 ; DS3.1@130.922,102.036 ccw(c130.08,102.879) 131.271,102.879 ccw(c132.716,102.879) DS3.1@131.694,101.857 ; DS3.1@131.271,101.688 v1(131.271,104.728) ; 131.271,103.492 ccw(c133.329,103.492) DS3.1@131.874,102.036 ; DS4.1@143.876,102.036 ccw(c142.727,103.185) 144.352,103.185 ccw(c145.977,103.185) DS4.1@144.828,102.036 ; v1@143.913,104.416 cw(c142.852,103.355) 144.352,103.355 ; DS4.1@144.056,101.857 ccw(c143.34,102.572) 144.352,102.572 ccw(c145.364,102.572) DS4.1@144.648,101.857 ; v1@144.092,104.595 cw(c143.466,103.969) 144.352,103.969 ; v1(144.272,104.775) 144.352,104.695 DS4.1@144.352,101.561 ; 144.352,103.742 cw(c145.305,103.742) v1@144.631,104.416
F: DS1.9 DS2.9 DS3.9 DS4.9 R16.2 | length 141.6
  Top Layer w0.254: v1@108.204,110.998 v1(108.344,111.138) ; v1@108.471,111.011 v1(146.939,110.998) ; v1@108.524,111.318 ccw(c109.264,112.057) 109.264,111.011 ; v1@108.703,110.779 cw(c109.264,110.218) 109.264,111.011 ; v1@108.703,111.497 ccw(c109.877,112.67) 109.877,111.011 ; 119.501,111.007 ccw(c119.501,112.682) v1@120.685,111.497 ; 120.114,111.007 ccw(c120.114,112.068) v1@120.864,111.318 ; 120.134,111.007 cw(c120.134,110.229) v1@120.685,110.779 ; v1@121.224,111.318 ccw(c121.974,112.068) 121.974,111.006 ; v1@121.403,110.779 cw(c121.953,110.228) 121.954,111.006 ; v1@121.403,111.497 ccw(c122.588,112.681) 122.587,111.006 ; 132.317,111.003 ccw(c132.318,112.692) v1@133.512,111.497 ; 132.93,111.003 ccw(c132.931,112.079) v1@133.691,111.318 ; 132.972,111.003 cw(c132.972,110.239) v1@133.512,110.779 ; v1@134.051,111.318 ccw(c134.812,112.078) 134.812,111.002 ; v1@134.23,110.779 cw(c134.77,110.239) 134.77,111.002 ; v1@134.23,111.497 ccw(c135.425,112.691) 135.425,111.002 ; R16.2@144.079,81.28 144.145,81.28 147.32,84.455 147.32,97.917 148.209,98.806 v1(148.209,103.378) ; R16.2@144.079,81.649 ccw(c144.079,82.699) 144.822,81.957 ; R16.2@144.079,81.903 ccw(c144.079,83.566) 145.255,82.39 ; R16.2@144.602,81.38 cw(c145.464,81.38) 144.854,81.989 ; v1@146.58,110.639 ccw(c145.712,109.772) 145.713,110.998 ccw(c145.713,112.225) v1@146.58,111.357 ; v1@147.85,103.019 cw(c146.983,102.152) 148.209,102.152 cw(c149.435,102.152) v1@148.568,103.019
  Bottom Layer w0.254: DS1.9@107.868,116.412 cw(c106.719,115.263) 108.344,115.263 cw(c109.969,115.263) DS1.9@108.82,116.412 ; v1@107.985,111.497 ccw(c107.118,112.364) 108.344,112.364 ccw(c109.57,112.364) v1@108.703,111.497 ; DS1.9@108.048,116.591 cw(c107.332,115.876) 108.344,115.876 cw(c109.356,115.876) DS1.9@108.64,116.591 ; v1(108.344,111.138) DS1.9@108.344,116.888 ; v1@120.685,111.497 ccw(c119.818,112.364) 121.044,112.364 ccw(c122.27,112.364) v1@121.403,111.497 ; DS2.9@120.695,116.285 cw(c119.853,115.442) 121.044,115.442 cw(c122.489,115.442) DS2.9@121.467,116.464 ; v1(121.044,111.138) DS2.9@121.044,116.761 ; 121.044,114.829 cw(c123.102,114.829) DS2.9@121.647,116.285 ; v1@133.512,111.497 ccw(c132.645,112.364) 133.871,112.364 ccw(c135.097,112.364) v1@134.23,111.497 ; DS3.9@133.522,116.285 cw(c132.68,115.442) 133.871,115.442 cw(c135.316,115.442) DS3.9@134.294,116.464 ; v1(133.871,111.138) DS3.9@133.871,116.761 ; 133.871,114.829 cw(c135.929,114.829) DS3.9@134.474,116.285 ; DS4.9@146.476,116.285 cw(c145.327,115.136) 146.952,115.136 cw(c148.577,115.136) DS4.9@147.428,116.285 ; v1@146.58,111.357 ccw(c145.681,112.256) 146.952,112.256 ; DS4.9@146.656,116.464 cw(c145.94,115.749) 146.952,115.749 cw(c147.964,115.749) DS4.9@147.248,116.464 ; v1@146.759,111.178 ccw(c146.294,111.643) 146.952,111.643 ; v1@146.939,110.49 cw(c146.939,109.264) 147.806,110.131 cw(c148.673,110.998) v1@147.447,110.998 ; 146.952,112.193 ccw(c148.134,112.193) v1@147.298,111.357 ; DS4.9@146.952,116.761 146.952,111.011 v1(146.939,110.998) 148.209,109.728 v1(148.209,103.378) ; v1@147.85,103.737 ccw(c146.983,104.604) 148.209,104.604 ccw(c149.435,104.604) v1@148.568,103.737
G: DS1.10 DS2.10 DS3.10 DS4.10 R17.2 | length 160.9
  Top Layer w0.254: v1(105.791,109.855) 105.918,109.728 155.702,109.728 156.337,109.093 156.337,106.807 155.194,105.664 151.638,105.664 150.749,104.775 150.749,98.552 147.828,95.631 147.828,81.026 145.542,78.74 R17.2@144.079,78.74 ; v1@105.971,110.035 ccw(c106.711,110.775) 106.711,109.728 ccw(c106.711,108.935) v1@106.15,109.496 ; v1@106.15,110.214 ccw(c107.324,111.388) 107.324,109.728 ; 116.958,109.728 ccw(c116.958,111.388) v1@118.132,110.214 ; v1@118.132,109.496 ccw(c117.571,108.935) 117.571,109.728 ccw(c117.571,110.775) v1@118.311,110.035 ; v1@118.671,110.035 ccw(c119.411,110.775) 119.411,109.728 ccw(c119.411,108.935) v1@118.85,109.496 ; v1@118.85,110.214 ccw(c120.024,111.388) 120.024,109.728 ; 129.785,109.728 ccw(c129.785,111.388) v1@130.959,110.214 ; v1@130.959,109.496 ccw(c130.398,108.935) 130.398,109.728 ccw(c130.398,110.775) v1@131.138,110.035 ; v1@131.498,110.035 ccw(c132.238,110.775) 132.238,109.728 ccw(c132.238,108.935) v1@131.677,109.496 ; v1@131.677,110.214 ccw(c132.851,111.388) 132.851,109.728 ; v1@144.04,109.369 ccw(c143.173,108.502) 143.173,109.728 ccw(c143.173,110.954) v1@144.04,110.087 ; R17.2@144.449,78.37 cw(c145.342,77.477) 145.342,78.74 cw(c145.342,80.003) R17.2@144.449,79.11 ; v1@144.758,109.369 cw(c145.625,108.502) 145.625,109.728 cw(c145.625,110.954) v1@144.758,110.087
  Bottom Layer w0.254: DS1.10@105.271,116.409 cw(c104.13,115.252) 105.755,115.263 cw(c107.38,115.274) DS1.10@106.223,116.415 ; v1@105.429,110.212 ccw(c104.556,111.073) 105.783,111.081 ccw(c107.009,111.09) v1@106.148,110.217 ; DS1.10@105.45,116.589 cw(c104.739,115.869) 105.751,115.876 cw(c106.762,115.883) DS1.10@106.042,116.593 ; DS1.10@105.744,116.888 v1(105.791,109.855) ; DS2.10@118.098,116.282 cw(c117.26,115.432) 118.454,115.44 ; v1@118.129,110.212 ccw(c117.256,111.073) 118.483,111.081 ccw(c119.709,111.09) v1@118.848,110.217 ; DS2.10@118.444,116.888 v1(118.491,109.855) ; 118.454,115.444 cw(c119.896,115.453) DS2.10@118.869,116.466 ; 118.458,114.83 cw(c120.513,114.844) DS2.10@119.05,116.288 ; DS3.10@130.925,116.282 cw(c130.087,115.432) 131.281,115.44 ; v1@130.956,110.212 ccw(c130.083,111.073) 131.31,111.081 ccw(c132.536,111.09) v1@131.675,110.217 ; DS3.10@131.271,116.888 v1(131.318,109.855) ; 131.281,115.444 cw(c132.723,115.453) DS3.10@131.696,116.466 ; 131.285,114.83 cw(c133.34,114.844) DS3.10@131.877,116.288 ; DS4.10@143.876,116.285 cw(c142.727,115.136) 144.352,115.136 cw(c145.977,115.136) DS4.10@144.828,116.285 ; v1@144.04,110.087 ccw(c143.286,110.841) 144.352,110.841 ; DS4.10@144.056,116.464 cw(c143.34,115.749) 144.352,115.749 cw(c145.364,115.749) DS4.10@144.648,116.464 ; 144.352,110.455 ccw(c145.126,110.455) v1@144.579,109.908 ; 144.352,111.068 ccw(c145.739,111.068) v1@144.758,110.087 ; DS4.10@144.352,116.761 144.352,109.775 v1(144.399,109.728)